# Altium PCB USV_pwrmtr_V2.PcbDoc (part 1 of 2)
Units mm, origin at the board's own origin, x right, y up, seen from the top; angles counter-clockwise.
Board outline 28.2 x 26.2 mm, 4 copper layers (Top Layer, Layer 1, Layer 2, Bottom Layer), stack 1.566 mm thick; 48 components, 47 nets, 320 pads, 208 vias.
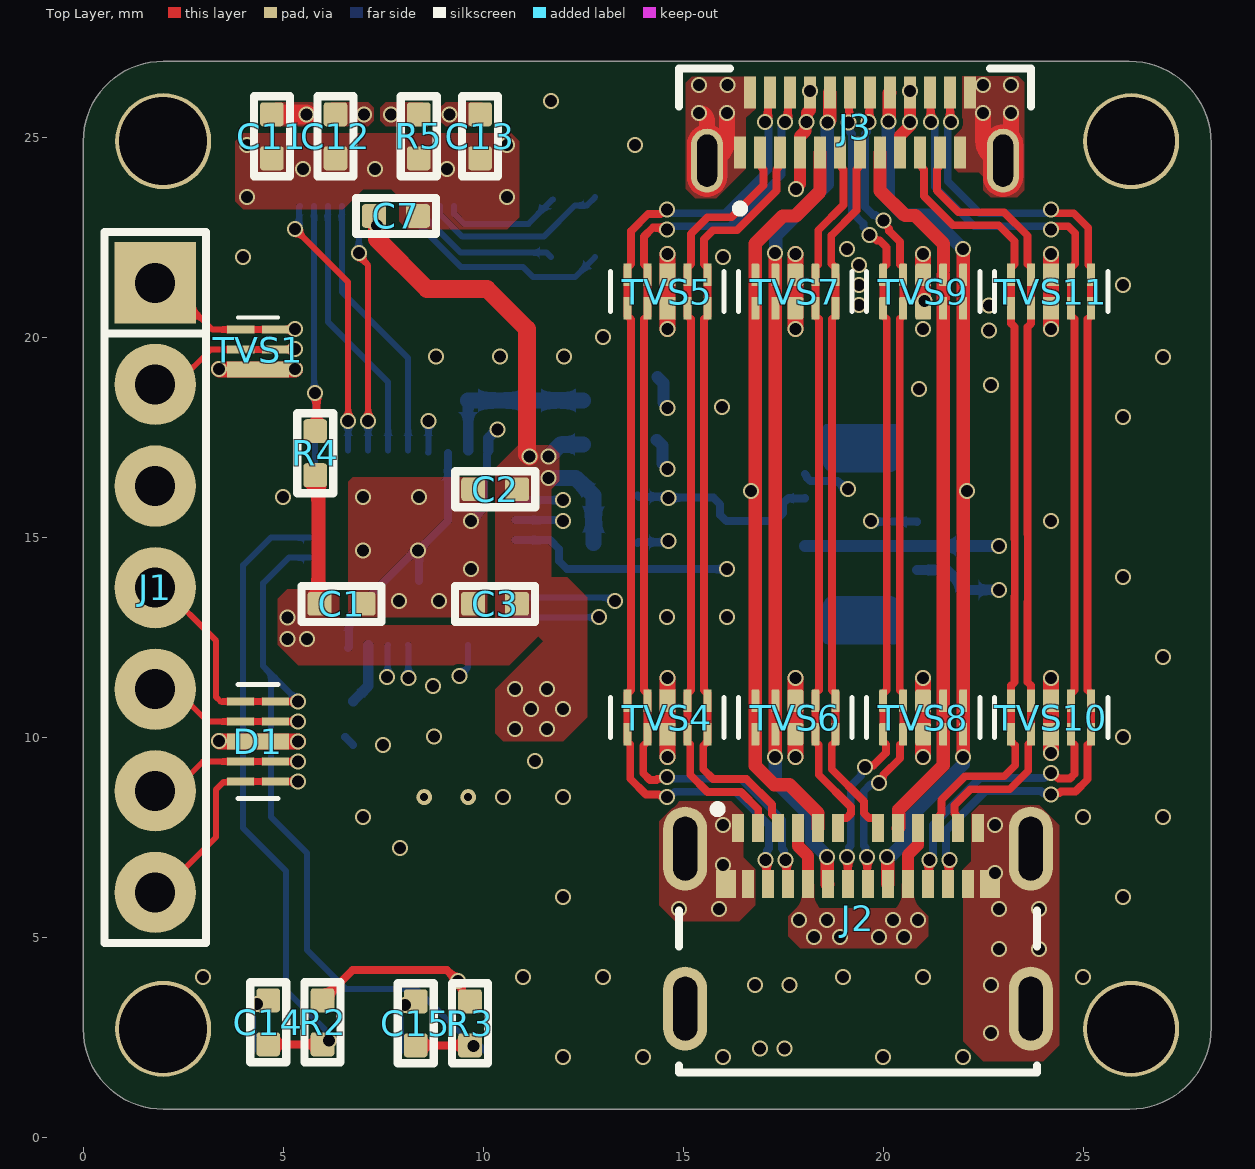
[diagram p0: Top Layer view]
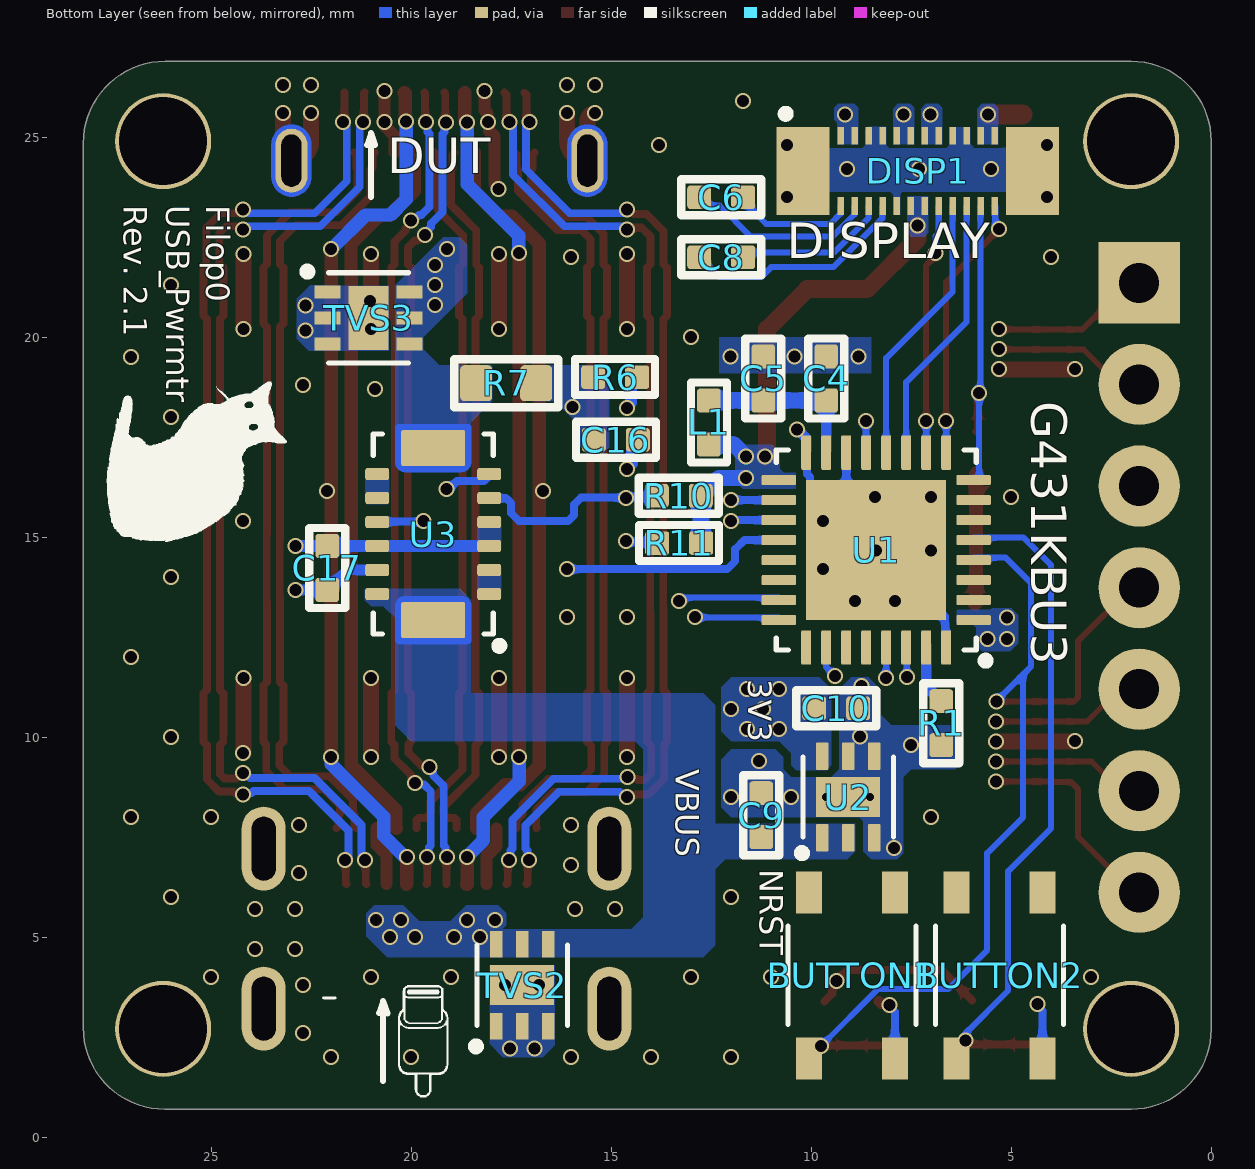
[diagram p1: Bottom Layer view, seen from below]
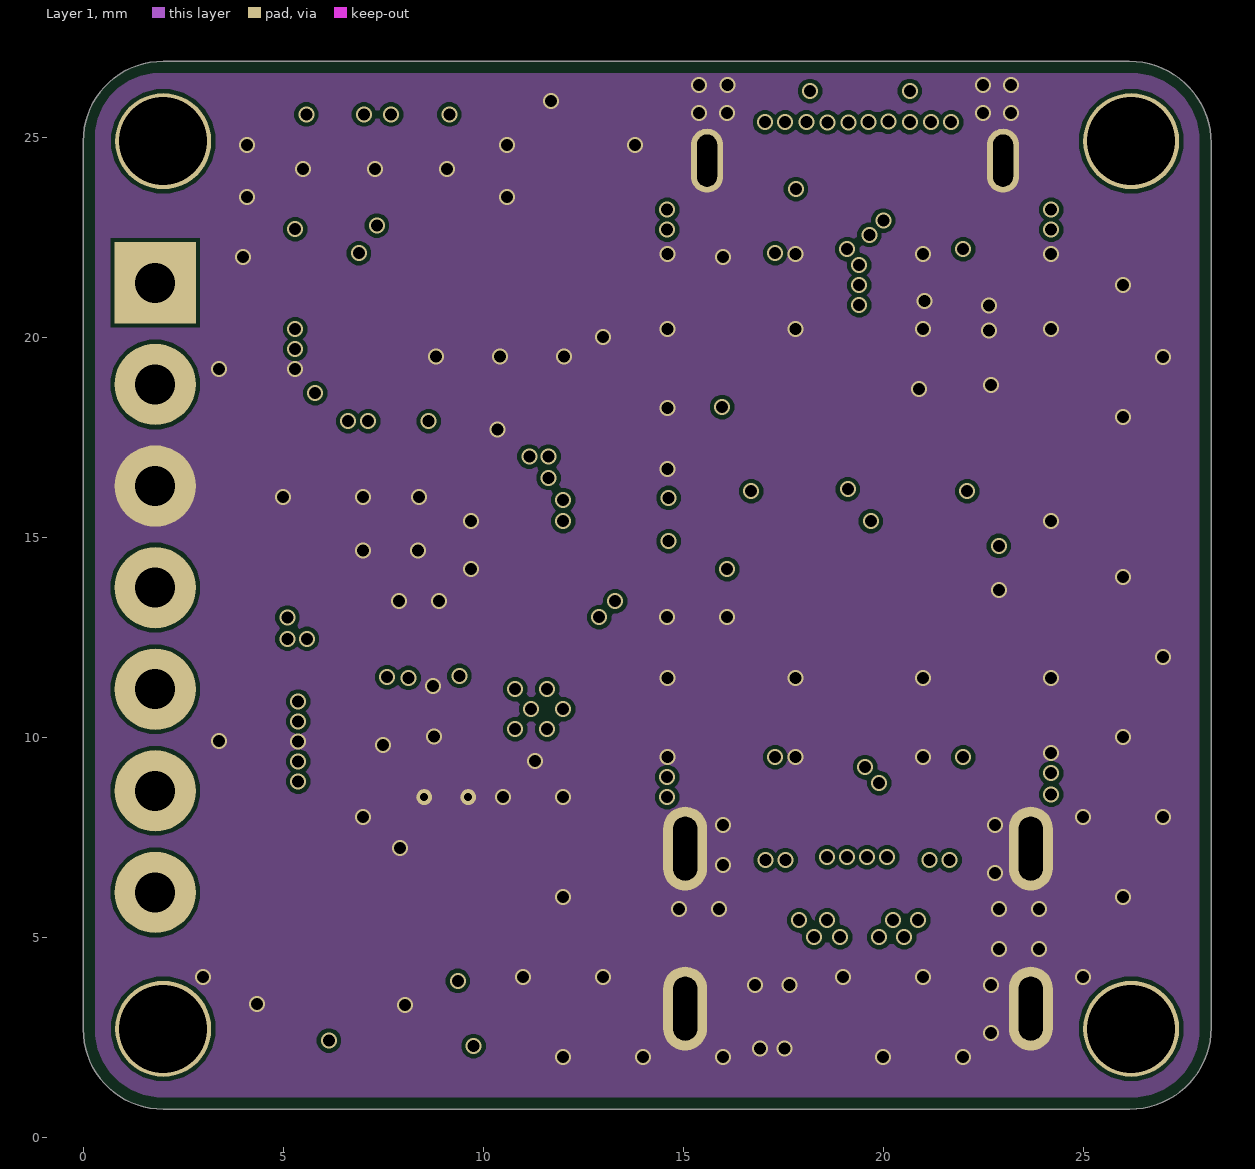
[diagram p2: Layer 1]
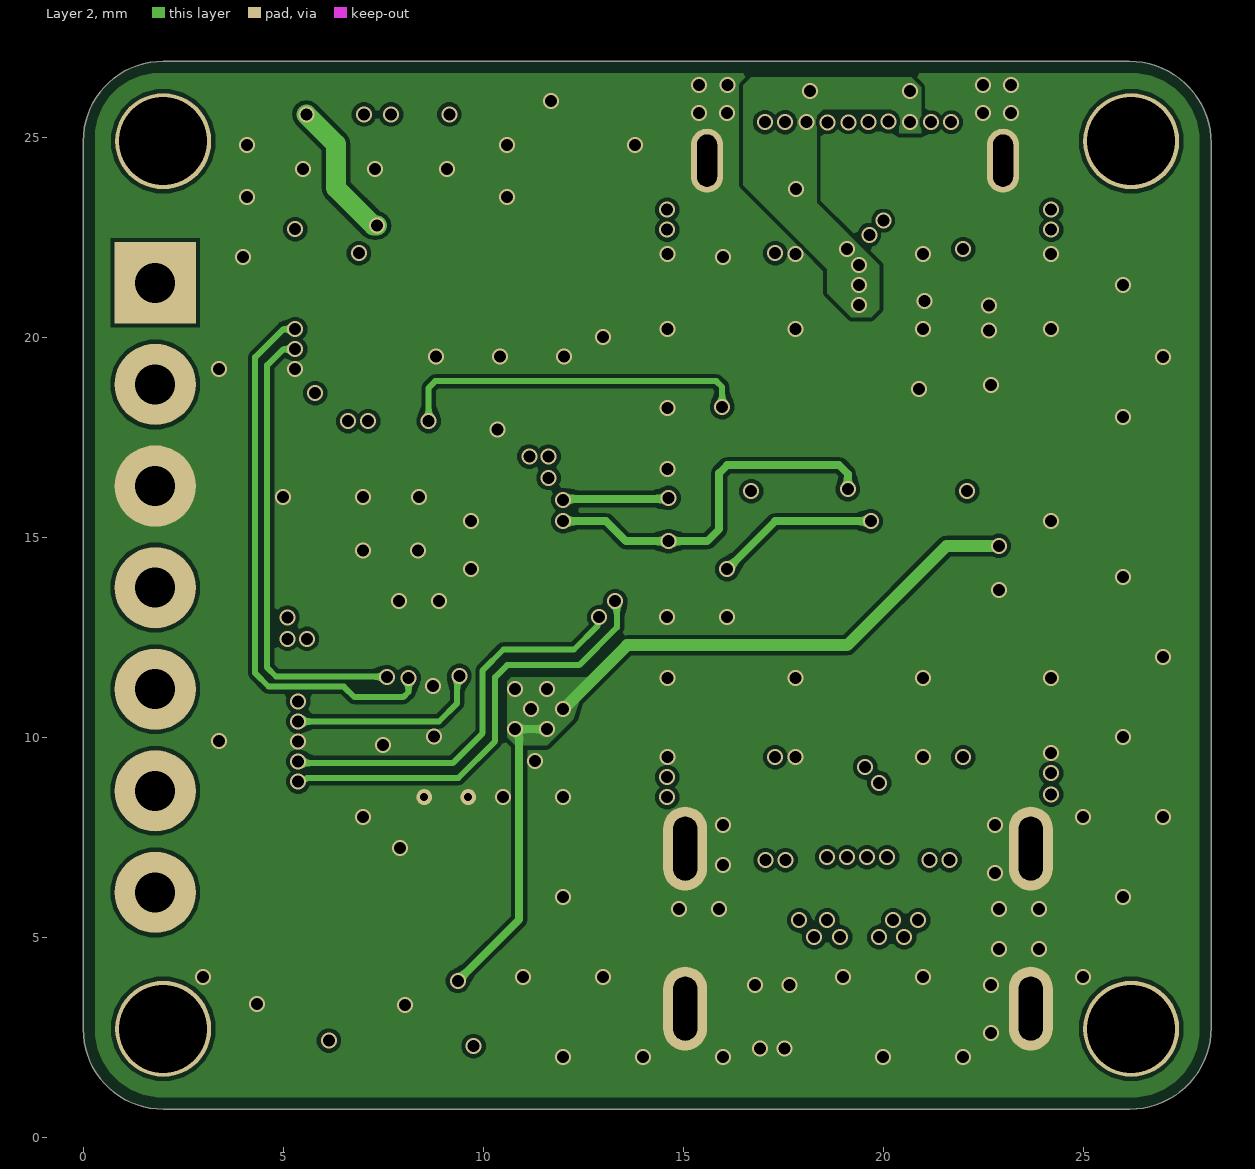
[diagram p3: Layer 2]

## Layer stack, top to bottom
Top Solder: solder mask 0.0254, SM-001, Dk 4
Top Layer: signal copper 0.035
Dielectric 1: prepreg 0.203, 7628*1, Dk 4.4
Layer 1: signal copper 0.03
Dielectric 3: core 1.03, Core, Dk 4.6
Layer 2: signal copper 0.03
Dielectric 5: prepreg 0.203, 7628*1, Dk 4.4
Bottom Layer: signal copper 0.035
Bottom Solder: solder mask 0.0254, SM-001, Dk 4

## Board outline
0,2.7 0,24.9 cw(c2,24.9) 2,26.9 26.151,26.9 cw(c26.151,24.851) 28.2,24.851 28.2,2.737 cw(c26.163,2.737) 26.163,0.7 2,0.7 cw(c2,2.7)

## Design rules (kind name [scope] priority, off if disabled: settings)
Clearance [All] p1: gap=0.128 ignorepadtopadclearanceinfootprint=TRUE except(0.1: Arc-Arc Arc-Track Arc-SMDPad Arc-Poly Track-Track Track-SMDPad Track-Via Track-Poly SMDPad-SMDPad SMDPad-Via SMDPad-Poly THPad-Poly Via-Via Via-Poly Fill-Poly Poly-Poly; 0.15: Arc-Hole Track-Hole SMDPad-Hole THPad-Hole Via-Hole Fill-Hole Poly-Hole Region-Hole Text-Hole; 0.2: Arc-THPad Track-THPad SMDPad-THPad THPad-THPad; 0.254: Arc-Text Track-Text SMDPad-Text THPad-Text Via-Text Fill-Text Poly-Text Region-Text)
DiffPairsRouting [All] p1: maxlimit=0.254 minlimit=0.127 mostfreqgap=0.254 toplayer_maxgap=0.127 toplayer_prefgap=0.127 toplayer_minwidth=0.198 toplayer_maxwidth=0.198 toplayer_prefwidth=0.198 bottomlayer_maxgap=0.127 bottomlayer_prefgap=0.127 bottomlayer_minwidth=0.198 bottomlayer_maxwidth=0.198 bottomlayer_prefwidth=0.198 impedanceprofiledriven=TRUE impedanceprofileid={0CCBBEDB-88AE-4A81-B5B6-981C13148A1B} impedanceprofilevalue=90.000000 maxuncoupledlength=12.7
HoleToHoleClearance [All] p1: gap=0.1 allowstackedmicrovias=TRUE
MinimumSolderMaskSliver [All] p1: minsoldermaskwidth=0
PolygonConnect [All] p1: connectstyle=Direct reliefconductorwidth=0.254 reliefentries=4 polygonreliefangle="90 Angle" airgapwidth=0.254
RoutingVias [All] p1: holewidth=0.4 width=0.3 viastyle="Through Hole" minholewidth=0.3 minwidth=0.2 maxholewidth=1.54 maxwidth=1.27
SilkToSilkClearance [All] p1: silktosilkclearance=0
SilkToSolderMaskClearance [IsPad] p1: minsilkscreentomaskgap=0 clearancetoexposedcopper=TRUE
SolderMaskExpansion [All] p1: expansion=0 istentingtop=FALSE
SupplyNets "Schematic Supply Nets_4" [InNet('CABLE_VCC_USB_C')] p1: voltage=0.000
SupplyNets "Schematic Supply Nets_3" [InNet('VDD')] p2: voltage=0.000
SupplyNets "Schematic Supply Nets_2" [InNet('DUT_VCC_USB_C')] p3: voltage=0.000
SupplyNets "Schematic Supply Nets" [InNet('GND')] p4: voltage=0.000
UnRoutedNet [All] p1: checkbadconnections=TRUE
Width SP50 [InNetClass('SP50')] p1: maxlimit=0.335 minlimit=0.254 preferedwidth=0.335 toplayer_minwidth=0.335 bottomlayer_minwidth=0.335 impedanceprofiledriven=TRUE impedanceprofileid={A461661E-8C72-4871-A755-800052891FCA} impedanceprofilevalue=50.000000 minimp=50.000000 maximp=50.000000 favimp=50.000000
Width [All] p2: maxlimit=20 minlimit=0.1 preferedwidth=0.15 minimp=50.000000 maximp=50.000000 favimp=50.000000
24 further rules are at their usual default settings.

## Classes and differential pairs
differential pair D1: +D1_P -D1_N
differential pair D2: +D2_P -D2_N
differential pair SSTX2: +SSTX2_P -SSTX2_N
differential pair SSTX1: +SSTX1_P -SSTX1_N
differential pair SSRX2: +SSRX2_P -SSRX2_N
differential pair SSRX1: +SSRX1_P -SSRX1_N

## Components (designator, comment, footprint, x,y, rotation, side; value= is the part's Value field where it differs from the comment)
BUTTON1 "SKRPABE010" SKRPABE010 8.984,4.049 r90 bottom
BUTTON2 "SKRPABE010" SKRPABE010 5.294,4.049 r90 bottom
C1 "100nF" C0402 6.457,13.335 r180 top
C2 "100nF" C0402 10.3,16.2 r0 top
C3 "4.7uF" C0402 10.296,13.335 r0 top
C4 "100nF" C0402 9.625,18.969 r270 bottom
C5 "1uF" C0402 11.2,18.969 r270 bottom
C6 "1uF" C0402 12.25,23.5 r180 bottom
C7 "1uF" C0402 7.819,23.032 r180 top
C8 "1uF" C0402 12.25,22 r180 bottom
C9 "10u" C0402 11.25,8.05 r270 bottom
C10 "1u" C0402 9.375,10.725 r0 bottom
C11 "1u" C0402 4.716,25.024 r90 top
C12 "2u2" C0402 6.307,25.024 r90 top
C13 "2u2" C0402 9.923,25.024 r90 top
C14 "100nF" C0402 4.625,2.874 r270 top
C15 "100nF" C0402 8.311,2.849 r270 top
C16 "100nF" C0402 14.885,17.437 r180 bottom
C17 "100nF" C0402 22.1,14.234 r270 bottom
D1 "RCLAMP0524PATCT" DIO_RCLAMP0524PATCT 4.37,9.893 r0 top
DISP1 "WP26DK-S024VA3" WP26DK-S024VA3 7.338,24.162 r0 bottom
J1 "CON7" SIP7 1.8,13.74 r270 top
J2 "USB4081-03-A" USB4081-03-A 19.367,4.805 r0 top
J3 "USB4155-03-C" USB4155-03-C 19.295,25.365 r180 top
L1 "ILHB0402ER102VHF12" L0402 12.557,17.869 r90 bottom
R1 "10k" R0402 6.75,10.35 r90 bottom
R2 "10k" R0402 5.982,2.874 r270 top
R3 "10k" R0402 9.669,2.849 r270 top
R4 "10k" R0402 5.8,17.1 r90 top
R5 "620k" R0402 8.388,25.024 r270 top
R6 "1k" R0402 14.901,19.002 r0 bottom
R7 "10k" R0603 17.625,18.85 r0 bottom
R10 "4k7" R0402 13.312,16.038 r0 bottom
R11 "4k7" R0402 13.302,14.854 r0 bottom
TVS1 "RCLAMP0522P.TCT" RCLAMP0522PTCT 4.37,19.693 r270 top
TVS2 "TVS2200DRVR" TVS2200DRVR 17.225,3.8 r90 bottom
TVS3 "TVS2200DRVR" TVS2200DRVR 21.068,20.482 r180 bottom
TVS4 "TPD4E02B04" TPD4E02B04 14.604,10.491 r270 top
TVS5 "TPD4E02B04" TPD4E02B04 14.604,21.14 r270 top
TVS6 "TPD4E05U06DQAR" TPD4E05U06DQAR 17.802,10.491 r270 top
TVS7 "TPD4E05U06DQAR" TPD4E05U06DQAR 17.802,21.14 r270 top
TVS8 "TPD4E05U06DQAR" TPD4E05U06DQAR 21,10.491 r270 top
TVS9 "TPD4E05U06DQAR" TPD4E05U06DQAR 21,21.14 r270 top
TVS10 "TPD4E02B04" TPD4E02B04 24.198,10.491 r270 top
TVS11 "TPD4E02B04" TPD4E02B04 24.198,21.14 r270 top
U1 "STM32G431KBU3" STM32G431KBU3 8.375,14.679 r0 bottom
U2 "TPS7B8233QDRVRQ1" TPS7B8233QDRVRQ1 9.075,8.505 r90 bottom
U3 "INA745AQWRELRQ1" INA745AQWRELRQ1 19.45,15.08 r0 bottom

## Footprints (in the part's own frame and the unit in brackets; to place one, negate y for a bottom-side part, rotate by r counter-clockwise, add the part's x,y. Pads: shape width x height; smd on the part's side, far side on the other; paste and mask are expansions set on the pad)
C0402 [mm]
  rrect25% 0.6x0.59 smd: 1(-0.55,0) 2(0.55,0)
  silkscreen extent -1,-0.45 1,0.45, body extent -0.48,-0.3 0.52,0.3, height 0.2
DIO_RCLAMP0524PATCT [mm]
  rect 0.675x0.2 smd: 1(-0.437,1) 2(-0.437,0.5) 4(-0.437,-0.5) 5(-0.437,-1) 6(0.437,-1) 7(0.437,-0.5) 9(0.437,0.5) 10(0.437,1)
  rect 1.55x0.4 smd: 3_8(0,0)
  silkscreen extent -0.5,-1.42 0.5,1.42, body extent -0.5,-1.25 0.5,1.25, height 0.65
INA745AQWRELRQ1 [mm]
  rrect35% 0.6x0.3 smd paste+0 mask+0: 1(-1.4,1.5) 2(-1.4,0.9) 3(-1.4,0.3) 4(-1.4,-0.3) 5(-1.4,-0.9) 6(-1.4,-1.5) 8(1.4,-1.5) 9(1.4,-0.9) 10(1.4,-0.3) 11(1.4,0.3) 12(1.4,0.9) 13(1.4,1.5)
  rrect10% 1.6x0.9 smd paste-2 mask+0: 7(0,-2.15) 14(0,2.15)
  Top Layer region: 0.86,2.749 0.866,2.749 0.871,2.748 0.876,2.747 0.881,2.745 0.886,2.743 0.891,2.741 0.895,2.739 0.9,2.737 0.904,2.734 0.909,2.731 0.913,2.728 0.917,2.724 0.921,2.721 0.924,2.717 0.928,2.713 0.931,2.709 0.934,2.704 0.937,2.7 0.939,2.695 0.941,2.691 0.943,2.686 0.945,2.681 0.947,2.676 0.948,2.671 0.949,2.666 0.949,2.66 0.95,2.655 0.95,2.65 0.95,1.8 0.95,1.787 0.949,1.774 0.947,1.761 0.945,1.748 0.941,1.735 0.938,1.723 0.933,1.71 0.928,1.698 0.923,1.687 0.917,1.675 0.91,1.664 0.902,1.653 0.894,1.643 0.886,1.633 0.877,1.623 0.867,1.614 0.857,1.606 0.847,1.598 0.836,1.59 0.825,1.583 0.813,1.577 0.802,1.572 0.79,1.567 0.777,1.562 0.765,1.559 0.752,1.555 0.739,1.553 0.726,1.551 0.713,1.55 -0.713,1.55 -0.726,1.551 -0.739,1.553 -0.752,1.555 -0.765,1.559 -0.777,1.562 -0.79,1.567 -0.802,1.572 -0.813,1.577 -0.825,1.583 -0.836,1.59 -0.847,1.598 -0.857,1.606 -0.867,1.614 -0.877,1.623 -0.886,1.633 -0.894,1.643 -0.902,1.653 -0.91,1.664 -0.917,1.675 -0.923,1.687 -0.928,1.698 -0.933,1.71 -0.938,1.723 -0.941,1.735 -0.945,1.748 -0.947,1.761 -0.949,1.774 -0.95,1.787 -0.95,1.8 -0.95,2.65 -0.95,2.655 -0.949,2.66 -0.949,2.666 -0.948,2.671 -0.947,2.676 -0.945,2.681 -0.943,2.686 -0.941,2.691 -0.939,2.695 -0.937,2.7 -0.934,2.704 -0.931,2.709 -0.928,2.713 -0.924,2.717 -0.921,2.721 -0.917,2.724 -0.913,2.728 -0.909,2.731 -0.904,2.734 -0.9,2.737 -0.895,2.739 -0.891,2.741 -0.886,2.743 -0.881,2.745 -0.876,2.747 -0.871,2.748 -0.866,2.749 -0.86,2.749 -0.855,2.75 0.855,2.75
  Top Layer region: 0.726,-1.551 0.739,-1.553 0.752,-1.555 0.765,-1.559 0.777,-1.562 0.79,-1.567 0.802,-1.572 0.813,-1.577 0.825,-1.583 0.836,-1.59 0.847,-1.598 0.857,-1.606 0.867,-1.614 0.877,-1.623 0.886,-1.633 0.894,-1.643 0.902,-1.653 0.91,-1.664 0.917,-1.675 0.923,-1.687 0.928,-1.698 0.933,-1.71 0.938,-1.723 0.941,-1.735 0.945,-1.748 0.947,-1.761 0.949,-1.774 0.95,-1.787 0.95,-1.8 0.95,-2.65 0.95,-2.655 0.949,-2.66 0.949,-2.666 0.948,-2.671 0.947,-2.676 0.945,-2.681 0.943,-2.686 0.941,-2.691 0.939,-2.695 0.937,-2.7 0.934,-2.704 0.931,-2.709 0.928,-2.713 0.924,-2.717 0.921,-2.721 0.917,-2.724 0.913,-2.728 0.909,-2.731 0.904,-2.734 0.9,-2.737 0.895,-2.739 0.891,-2.741 0.886,-2.743 0.881,-2.745 0.876,-2.747 0.871,-2.748 0.866,-2.749 0.86,-2.749 0.855,-2.75 -0.855,-2.75 -0.86,-2.749 -0.866,-2.749 -0.871,-2.748 -0.876,-2.747 -0.881,-2.745 -0.886,-2.743 -0.891,-2.741 -0.895,-2.739 -0.9,-2.737 -0.904,-2.734 -0.909,-2.731 -0.913,-2.728 -0.917,-2.724 -0.921,-2.721 -0.924,-2.717 -0.928,-2.713 -0.931,-2.709 -0.934,-2.704 -0.937,-2.7 -0.939,-2.695 -0.941,-2.691 -0.943,-2.686 -0.945,-2.681 -0.947,-2.676 -0.948,-2.671 -0.949,-2.666 -0.949,-2.66 -0.95,-2.655 -0.95,-2.65 -0.95,-1.8 -0.95,-1.787 -0.949,-1.774 -0.947,-1.761 -0.945,-1.748 -0.941,-1.735 -0.938,-1.723 -0.933,-1.71 -0.928,-1.698 -0.923,-1.687 -0.917,-1.675 -0.91,-1.664 -0.902,-1.653 -0.894,-1.643 -0.886,-1.633 -0.877,-1.623 -0.867,-1.614 -0.857,-1.606 -0.847,-1.598 -0.836,-1.59 -0.825,-1.583 -0.813,-1.577 -0.802,-1.572 -0.79,-1.567 -0.777,-1.562 -0.765,-1.559 -0.752,-1.555 -0.739,-1.553 -0.726,-1.551 -0.713,-1.55 0.713,-1.55
  silkscreen extent -1.75,-2.5 1.5,2.89, body extent -1.5,-2.5 1.5,2.5, height 1
L0402 [mm]
  rrect25% 0.6x0.59 smd: 1(-0.55,0) 2(0.55,0)
  silkscreen extent -1,-0.45 1,0.45, body extent -0.5,-0.25 0.5,0.25, height 0.51
R0402 [mm]
  rrect25% 0.6x0.59 smd: 1(-0.55,0) 2(0.55,0)
  silkscreen extent -1,-0.45 1,0.45, body extent -0.52,-0.3 0.52,0.3, height 0.34
R0603 [mm]
  rrect25% 0.8x0.9 smd: 1(-0.75,0) 2(0.75,0)
  silkscreen extent -1.3,-0.6 1.3,0.6, body extent -0.8,-0.4 0.8,0.4, height 0.3
RCLAMP0522PTCT [mm]
  rect 0.2x0.68 smd: 1(-0.5,-0.435) 2(0,-0.435) 5(0,0.435) 6(-0.5,0.435)
  rect 0.4x0.775 smd: 3(0.5,-0.388) 4(0.5,0.387)
  silkscreen extent -0.8,-0.5 -0.8,0.5, body extent -0.8,-0.5 0.8,0.5, height 0.58
SIP7 [mil]
  rect 80x80 hole 39.37: 1(-300,0)
  round 80 hole 39.37: 2(-200,0) 3(-100,0) 4(0,0) 5(100,0) 6(200,0) 7(300,0)
  silkscreen extent -350,-50 350,50
SKRPABE010 [mm]
  rect 1.05x0.65 smd: 1(-2.075,1.075) 2(2.075,1.075) 3(-2.075,-1.075) 4(2.075,-1.075)
  silkscreen extent -1.23,-1.6 1.23,1.6, body extent -2.3,-1.6 2.3,1.6, height 2.5
STM32G431KBU3 [mm] "ARM® Cortex®-M4F STM32G4 Microcontroller IC 32-Bit Single-Core 170MHz 128KB (128K x 8) FLASH 32-UFQFPN (5x5)"
  rrect25% 0.86x0.25 smd: 1(-2.435,1.75) 2(-2.435,1.25) 3(-2.435,0.75) 4(-2.435,0.25) 5(-2.435,-0.25) 6(-2.435,-0.75) 7(-2.435,-1.25) 8(-2.435,-1.75) 17(2.435,-1.75) 18(2.435,-1.25) 19(2.435,-0.75) 20(2.435,-0.25) 21(2.435,0.25) 22(2.435,0.75) 23(2.435,1.25) 24(2.435,1.75)
  rrect25% 0.25x0.86 smd: 9(-1.75,-2.435) 10(-1.25,-2.435) 11(-0.75,-2.435) 12(-0.25,-2.435) 13(0.25,-2.435) 14(0.75,-2.435) 15(1.25,-2.435) 16(1.75,-2.435) 25(1.75,2.435) 26(1.25,2.435) 27(0.75,2.435) 28(0.25,2.435) 29(-0.25,2.435) 30(-0.75,2.435) 31(-1.25,2.435) 32(-1.75,2.435)
  rect 3.5x3.5 smd paste-0.64: 33(0,0)
  silkscreen extent -2.83,-2.5 2.5,2.87, body extent -2.5,-2.5 2.5,2.5, height 0.6
TPD4E02B04 [mm]
  rect 0.565x0.2 smd mask+0: 1(-0.417,1) 2(-0.417,0.5) 4(-0.417,-0.5) 5(-0.417,-1) 6(0.417,-1) 7(0.417,-0.5) 9(0.417,0.5) 10(0.417,1)
  rect 0.565x0.4 smd paste-1 mask+0: 3(-0.417,0) 8(0.417,0)
  silkscreen extent -0.5,-1.42 0.5,1.42, body extent -0.5,-1.25 0.5,1.25, height 0.55
TPD4E05U06DQAR [mm] "Quad 0.5-pF, 5.5-V, ±12-kV ESD protection diode for USB, HDMI & High Speed Interfaces"
  rrect25% 0.565x0.2 smd mask+0: 1(-0.417,1) 2(-0.417,0.5) 4(-0.417,-0.5) 5(-0.417,-1) 6(0.417,-1) 7(0.417,-0.5) 9(0.417,0.5) 10(0.417,1)
  rrect25% 0.565x0.4 smd paste-1 mask+0: 3(-0.417,0) 8(0.417,0)
  silkscreen extent -0.5,-1.42 0.5,1.42, body extent -0.5,-1.25 0.5,1.25, height 0.55
TPS7B8233QDRVRQ1 [mm] "Automotive 300-mA, off-battery (40-V), ultra-low-IQ LDO with enable in AEC-Q100 Grade-0 and Grade-1"
  rrect25% 0.69x0.32 smd: 1(-1.02,0.65) 2(-1.02,0) 3(-1.02,-0.65) 4(1.02,-0.65) 5(1.02,0) 6(1.02,0.65)
  rect 1x1.6 smd paste-2: 7(0,0)
  round 0.4 hole 0.2 mask+0: 8(0,0.55) 9(0,-0.55)
  silkscreen extent -1.5,-1.13 1,1.26, body extent -1,-1 1,1, height 0.8
TVS2200DRVR [mm]
  rect 0.66x0.32 smd: 1(-1.025,0.65) 2(-1.025,0) 3(-1.025,-0.65) 4(1.025,-0.65) 5(1.025,0) 6(1.025,0.65)
  rect 1x1.6 smd paste-2: 7(0,0)
  silkscreen extent -1.63,-1.13 1,1.26, body extent -1,-1 1,1, height 0.8
USB4081-03-A [mm] "Type C USB 3.2 Gen 2 Connector"
  rect 0.3x0.7 smd: A1(-2.999,2.921) A2(-2.499,2.921) A3(-1.999,2.921) A4(-1.499,2.921) A5(-0.999,2.921) A6(-0.499,2.921) A7(0.501,2.921) A8(1.001,2.921) A9(1.501,2.921) A10(2.001,2.921) A11(2.501,2.921) A12(3.001,2.921) B1(2.751,1.521) B2(2.251,1.521) B3(1.751,1.521) B4(1.251,1.521) B5(0.751,1.521) B6(0.251,1.521) B7(-0.249,1.521) B8(-0.749,1.521) B9(-1.249,1.521) B10(-1.749,1.521) B11(-2.249,1.521) B12(-2.749,1.521)
  oval 1.1x2.1 hole 0.6 slot 1.6 at 90 deg: S1(-4.319,-1.589) S2(4.321,-1.589) S3(-4.319,2.411) S4(4.321,2.411)
  rect 0.5x0.7 smd: S5(-3.299,1.521) S6(3.301,1.521)
  silkscreen extent -4.47,-3.19 4.47,3.5, body extent -4.47,-4.81 4.47,3, height 3.26
USB4155-03-C [mm] "USB-C (USB TYPE-C) USB 3.2 Gen 2 (USB 3.1 Gen 2, Superspeed + (USB 3.1)) Plug Connector 24 Position Board Edge, Cutout; Surface Mount; Through Hole, Right Angle"
  rect 0.3x0.8 smd: A1(2.875,0.75) A2(2.375,0.75) A3(1.875,0.75) A4(1.375,0.75) A5(0.875,0.75) A6(0.375,0.75) A7(-0.125,0.75) A8(-0.625,0.75) A9(-1.125,0.75) A10(-1.625,0.75) A11(-2.125,0.75) A12(-2.625,0.75) B1(-2.875,-0.75) B2(-2.375,-0.75) B3(-1.875,-0.75) B4(-1.375,-0.75) B5(-0.875,-0.75) B6(-0.375,-0.75) B7(0.125,-0.75) B8(0.625,-0.75) B9(1.125,-0.75) B10(1.625,-0.75) B11(2.125,-0.75) B12(2.625,-0.75)
  oval 0.8x1.6 hole 0.5 slot 1.3 at 90 deg mask+0: S1(-3.7,0.95) S2(3.7,0.95)
  Top Layer region: -3.674,1.849 -3.648,1.847 -3.622,1.844 -3.596,1.839 -3.571,1.833 -3.545,1.826 -3.521,1.817 -3.497,1.807 -3.473,1.796 -3.45,1.783 -3.428,1.769 -3.406,1.755 -3.385,1.739 -3.365,1.722 -3.346,1.704 -3.328,1.685 -3.311,1.665 -3.295,1.644 -3.281,1.622 -3.267,1.6 -3.254,1.577 -3.243,1.553 -3.233,1.529 -3.224,1.505 -3.217,1.479 -3.211,1.454 -3.206,1.428 -3.203,1.402 -3.201,1.376 -3.2,1.35 -3.2,0.55 -3.201,0.524 -3.203,0.498 -3.206,0.472 -3.211,0.446 -3.217,0.421 -3.224,0.395 -3.233,0.371 -3.243,0.347 -3.254,0.323 -3.267,0.3 -3.281,0.278 -3.295,0.256 -3.311,0.235 -3.328,0.215 -3.346,0.196 -3.365,0.178 -3.385,0.161 -3.406,0.145 -3.428,0.131 -3.45,0.117 -3.473,0.104 -3.497,0.093 -3.521,0.083 -3.545,0.074 -3.571,0.067 -3.596,0.061 -3.622,0.056 -3.648,0.053 -3.674,0.051 -3.7,0.05 -3.726,0.051 -3.752,0.053 -3.778,0.056 -3.804,0.061 -3.829,0.067 -3.855,0.074 -3.879,0.083 -3.903,0.093 -3.927,0.104 -3.95,0.117 -3.972,0.131 -3.994,0.145 -4.015,0.161 -4.035,0.178 -4.054,0.196 -4.072,0.215 -4.089,0.235 -4.105,0.256 -4.119,0.278 -4.133,0.3 -4.146,0.323 -4.157,0.347 -4.167,0.371 -4.176,0.395 -4.183,0.421 -4.189,0.446 -4.194,0.472 -4.197,0.498 -4.199,0.524 -4.2,0.55 -4.2,1.35 -4.199,1.376 -4.197,1.402 -4.194,1.428 -4.189,1.454 -4.183,1.479 -4.176,1.505 -4.167,1.529 -4.157,1.553 -4.146,1.577 -4.133,1.6 -4.119,1.622 -4.105,1.644 -4.089,1.665 -4.072,1.685 -4.054,1.704 -4.035,1.722 -4.015,1.739 -3.994,1.755 -3.972,1.769 -3.95,1.783 -3.927,1.796 -3.903,1.807 -3.879,1.817 -3.855,1.826 -3.829,1.833 -3.804,1.839 -3.778,1.844 -3.752,1.847 -3.726,1.849 -3.7,1.85
  Top Layer region: 3.726,1.849 3.752,1.847 3.778,1.844 3.804,1.839 3.829,1.833 3.855,1.826 3.879,1.817 3.903,1.807 3.927,1.796 3.95,1.783 3.972,1.769 3.994,1.755 4.015,1.739 4.035,1.722 4.054,1.704 4.072,1.685 4.089,1.665 4.105,1.644 4.119,1.622 4.133,1.6 4.146,1.577 4.157,1.553 4.167,1.529 4.176,1.505 4.183,1.479 4.189,1.454 4.194,1.428 4.197,1.402 4.199,1.376 4.2,1.35 4.2,0.55 4.199,0.524 4.197,0.498 4.194,0.472 4.189,0.446 4.183,0.421 4.176,0.395 4.167,0.371 4.157,0.347 4.146,0.323 4.133,0.3 4.119,0.278 4.105,0.256 4.089,0.235 4.072,0.215 4.054,0.196 4.035,0.178 4.015,0.161 3.994,0.145 3.972,0.131 3.95,0.117 3.927,0.104 3.903,0.093 3.879,0.083 3.855,0.074 3.829,0.067 3.804,0.061 3.778,0.056 3.752,0.053 3.726,0.051 3.7,0.05 3.674,0.051 3.648,0.053 3.622,0.056 3.596,0.061 3.571,0.067 3.545,0.074 3.521,0.083 3.497,0.093 3.473,0.104 3.45,0.117 3.428,0.131 3.406,0.145 3.385,0.161 3.365,0.178 3.346,0.196 3.328,0.215 3.311,0.235 3.295,0.256 3.281,0.278 3.267,0.3 3.254,0.323 3.243,0.347 3.233,0.371 3.224,0.395 3.217,0.421 3.211,0.446 3.206,0.472 3.203,0.498 3.201,0.524 3.2,0.55 3.2,1.35 3.201,1.376 3.203,1.402 3.206,1.428 3.211,1.454 3.217,1.479 3.224,1.505 3.233,1.529 3.243,1.553 3.254,1.577 3.267,1.6 3.281,1.622 3.295,1.644 3.311,1.665 3.328,1.685 3.346,1.704 3.365,1.722 3.385,1.739 3.406,1.755 3.428,1.769 3.45,1.783 3.473,1.796 3.497,1.807 3.521,1.817 3.545,1.826 3.571,1.833 3.596,1.839 3.622,1.844 3.648,1.847 3.674,1.849 3.7,1.85
  Bottom Layer region: -3.674,1.849 -3.648,1.847 -3.622,1.844 -3.596,1.839 -3.571,1.833 -3.545,1.826 -3.521,1.817 -3.497,1.807 -3.473,1.796 -3.45,1.783 -3.428,1.769 -3.406,1.755 -3.385,1.739 -3.365,1.722 -3.346,1.704 -3.328,1.685 -3.311,1.665 -3.295,1.644 -3.281,1.622 -3.267,1.6 -3.254,1.577 -3.243,1.553 -3.233,1.529 -3.224,1.505 -3.217,1.479 -3.211,1.454 -3.206,1.428 -3.203,1.402 -3.201,1.376 -3.2,1.35 -3.2,0.55 -3.201,0.524 -3.203,0.498 -3.206,0.472 -3.211,0.446 -3.217,0.421 -3.224,0.395 -3.233,0.371 -3.243,0.347 -3.254,0.323 -3.267,0.3 -3.281,0.278 -3.295,0.256 -3.311,0.235 -3.328,0.215 -3.346,0.196 -3.365,0.178 -3.385,0.161 -3.406,0.145 -3.428,0.131 -3.45,0.117 -3.473,0.104 -3.497,0.093 -3.521,0.083 -3.545,0.074 -3.571,0.067 -3.596,0.061 -3.622,0.056 -3.648,0.053 -3.674,0.051 -3.7,0.05 -3.726,0.051 -3.752,0.053 -3.778,0.056 -3.804,0.061 -3.829,0.067 -3.855,0.074 -3.879,0.083 -3.903,0.093 -3.927,0.104 -3.95,0.117 -3.972,0.131 -3.994,0.145 -4.015,0.161 -4.035,0.178 -4.054,0.196 -4.072,0.215 -4.089,0.235 -4.105,0.256 -4.119,0.278 -4.133,0.3 -4.146,0.323 -4.157,0.347 -4.167,0.371 -4.176,0.395 -4.183,0.421 -4.189,0.446 -4.194,0.472 -4.197,0.498 -4.199,0.524 -4.2,0.55 -4.2,1.35 -4.199,1.376 -4.197,1.402 -4.194,1.428 -4.189,1.454 -4.183,1.479 -4.176,1.505 -4.167,1.529 -4.157,1.553 -4.146,1.577 -4.133,1.6 -4.119,1.622 -4.105,1.644 -4.089,1.665 -4.072,1.685 -4.054,1.704 -4.035,1.722 -4.015,1.739 -3.994,1.755 -3.972,1.769 -3.95,1.783 -3.927,1.796 -3.903,1.807 -3.879,1.817 -3.855,1.826 -3.829,1.833 -3.804,1.839 -3.778,1.844 -3.752,1.847 -3.726,1.849 -3.7,1.85
  Bottom Layer region: 3.726,1.849 3.752,1.847 3.778,1.844 3.804,1.839 3.829,1.833 3.855,1.826 3.879,1.817 3.903,1.807 3.927,1.796 3.95,1.783 3.972,1.769 3.994,1.755 4.015,1.739 4.035,1.722 4.054,1.704 4.072,1.685 4.089,1.665 4.105,1.644 4.119,1.622 4.133,1.6 4.146,1.577 4.157,1.553 4.167,1.529 4.176,1.505 4.183,1.479 4.189,1.454 4.194,1.428 4.197,1.402 4.199,1.376 4.2,1.35 4.2,0.55 4.199,0.524 4.197,0.498 4.194,0.472 4.189,0.446 4.183,0.421 4.176,0.395 4.167,0.371 4.157,0.347 4.146,0.323 4.133,0.3 4.119,0.278 4.105,0.256 4.089,0.235 4.072,0.215 4.054,0.196 4.035,0.178 4.015,0.161 3.994,0.145 3.972,0.131 3.95,0.117 3.927,0.104 3.903,0.093 3.879,0.083 3.855,0.074 3.829,0.067 3.804,0.061 3.778,0.056 3.752,0.053 3.726,0.051 3.7,0.05 3.674,0.051 3.648,0.053 3.622,0.056 3.596,0.061 3.571,0.067 3.545,0.074 3.521,0.083 3.497,0.093 3.473,0.104 3.45,0.117 3.428,0.131 3.406,0.145 3.385,0.161 3.365,0.178 3.346,0.196 3.328,0.215 3.311,0.235 3.295,0.256 3.281,0.278 3.267,0.3 3.254,0.323 3.243,0.347 3.233,0.371 3.224,0.395 3.217,0.421 3.211,0.446 3.206,0.472 3.203,0.498 3.201,0.524 3.2,0.55 3.2,1.35 3.201,1.376 3.203,1.402 3.206,1.428 3.211,1.454 3.217,1.479 3.224,1.505 3.233,1.529 3.243,1.553 3.254,1.577 3.267,1.6 3.281,1.622 3.295,1.644 3.311,1.665 3.328,1.685 3.346,1.704 3.365,1.722 3.385,1.739 3.406,1.755 3.428,1.769 3.45,1.783 3.473,1.796 3.497,1.807 3.521,1.817 3.545,1.826 3.571,1.833 3.596,1.839 3.622,1.844 3.648,1.847 3.674,1.849 3.7,1.85
  silkscreen extent -4.4,-1.35 4.4,2.25, body extent -4.4,-14.05 4.4,1.45, height 1.6
WP26DK-S024VA3 [mm]
  rect 0.17x0.44 smd paste+0 mask+0: 1(1.925,-0.88) 2(1.925,0.88) 3(1.575,-0.88) 4(1.575,0.88) 5(1.225,-0.88) 6(1.225,0.88) 7(0.875,-0.88) 8(0.875,0.88) 9(0.525,-0.88) 10(0.525,0.88) 11(0.175,-0.88) 12(0.175,0.88) 13(-0.175,-0.88) 14(-0.175,0.88) 15(-0.525,-0.88) 16(-0.525,0.88) 17(-0.875,-0.88) 18(-0.875,0.88) 19(-1.225,-0.88) 20(-1.225,0.88) 21(-1.575,-0.88) 22(-1.575,0.88) 23(-1.925,-0.88) 24(-1.925,0.88)
  rect 1.33x2.2 smd paste-2 mask+0: P1(2.87,0) P2(-2.87,0)
  silkscreen extent 3.2,-1.52 3.4,-1.33, body extent -3.37,-0.95 3.37,0.95, height 0.6

## Part data
BUTTON1 BUTTON2: "Switch Tactile N.O. SPST Button J-Bend 0.05A 16VDC 1.57N SMD Automotive T/R"
C1 C2 C3 C4 C5 C6 C7 C8 C9 C10 C11 C12 C13 C14 C15 C16 C17: library part C, "Kondensator ceramiczny SMD"
D1: "15V Clamp 5A (8/20Âµs) Ipp Tvs Diode Surface Mount SLP2510P8", Package="UFDFN-10 Semtech", Check_prices=https://www.snapeda.com/parts/RCLAMP0524PATCT/Semtech+Corporation/view-part/?ref=eda, MF="Semtech Corporation", MP=RCLAMP0524PATCT, SnapEDA_Link=https://www.snapeda.com/parts/RCLAMP0524PATCT/Semtech+Corporation/view-part/?ref=snap
J1: "Connector"
J2: "Type C USB 3.2 Gen 2 Connector"
J3: "USB-C (USB TYPE-C) USB 3.2 Gen 2 (USB 3.1 Gen 2, Superspeed + (USB 3.1)) Receptacle Connector 24 Position Surface Mount, Right Angle; Through Hole"
L1: library part L, "Cewka/Koralik ferrytowy"
R1 R2 R3 R4 R5 R6 R7 R10 R11: library part R, "Rezystor SMD"
TVS1: "TVS Diode (Bi-directional)", Manufacturer_Name=SEMTECH, Mouser Part Number=947-RCLAMP0522P.TCT, Arrow Part Number=RCLAMP0522P.TCT, Arrow Price/Stock=https://www.arrow.com/en/products/rclamp0522p.tct/semtech?utm_currency=USD&region=nac, Datasheet Link=https://www.digikey.ph/en/products/detail/semtech-corporation/RCLAMP0522P-TCT/5113632, Height=0.65mm, Manufacturer_Part_Number=RCLAMP0522P.TCT, Mouser Price/Stock=https://www.mouser.co.uk/ProductDetail/Semtech/RCLAMP0522P.TCT?qs=rBWM4%252BvDhIdKBWbIaH8MsA%3D%3D
TVS2 TVS3: "22V flat-clamp surge protection device", ComponentLink1Description="New link", ComponentLink1URL=https://www.mouser.pl/ProductDetail/Texas-Instruments/TVS2200DRVR?qs=W0yvOO0ixfHPbvei2cYdIw%3D%3D
TVS6 TVS7 TVS8 TVS9: "ESD Protection Diodes / TVS Diodes 0.66-pF +/-3.6-V +/- 30-kV ESD protectio", ComponentLink1Description="New link", ComponentLink1URL=https://www.mouser.pl/ProductDetail/Texas-Instruments/TPD4E05U06DQAR?qs=%2FCrDlo5IrVPi4woOvWz0qA%3D%3D
U1: "ARM® Cortex®-M4F STM32G4 Microcontroller IC 32-Bit Single-Core 170MHz 128KB (128K x 8) FLASH 32-UFQFPN (5x5)", ComponentLink1Description="New link", ComponentLink1URL=https://www.mouser.pl/ProductDetail/STMicroelectronics/STM32G431KBU3?qs=PzGy0jfpSMtowkKWTRQBRw%3D%3D
U2: "WSON-6, Automotive 300-mA, off-battery (40-V), ultra-low-IQ LDO with enable in AEC-Q100 Grade-0 and Grade-1"
U3: "AEC-Q100 40V 16-bit high-precision I²C output digital power monitor with 800-µΩ EZShunt™ Technology", ComponentLink1Description="New link", ComponentLink1URL=https://www.digikey.com/en/products/detail/texas-instruments/INA745AQWRELRQ1/28022225
TVS4 TVS5 TVS10 TVS11: ComponentLink1Description="New link", ComponentLink1URL=https://www.mouser.pl/ProductDetail/Texas-Instruments/TPD4E02B04DQAR?qs=8%2FmU9qzJpL%2FFVYtHO1iV9g%3D%3D

## Free pads (board coordinates)
  round 2.4 hole 2.2: 10(2,2.711) 10(2,24.9) 10(26.2,2.711) 10(26.2,24.9)

## Via types
v1: diameter 0.4, hole 0.3, Top Layer to Bottom Layer, tented both sides, 208 vias

## Nets (pads, with @x,y where several pads share a name; then routed paths per layer and width w, separated by ;. In a path a pad name is that pad's centre, name@x,y a point inside that pad or via, vN(x,y) a via of type N, cw(c..) or ccw(c..) an arc to the next point about the centre after c; other vN are vias at no path point)
ADC1_IN15: C16.1 R6.2 R7.1 U1.13 | length 9.6
  Layer 2 w0.15: v1(8.637,17.9) 8.637,18.737 8.8,18.9 15.828,18.9 15.973,18.756 v1(15.973,18.254)
  Bottom Layer w0.15: U1.13@8.625,17.114 8.631,17.12 8.631,17.891 v1@8.637,17.897
ALERT: U1.20 U3.10 | length 11
  Layer 2 w0.2: v1(16.1,14.2) 17.3,15.4 v1(19.689,15.4)
  Bottom Layer w0.2: U1.20@10.81,14.929 11.671,14.929 11.9,14.7 11.9,14.4 12.1,14.2 v1(16.1,14.2) ; v1(19.689,15.4) 19.698,15.39 20.84,15.39 U3.10@20.85,15.38
BOOT0: R1.2 U1.31 | length 1.6
  Bottom Layer w0.254: R1.2@6.75,10.9 6.75,10.905 7.125,11.28 U1.31@7.125,12.308
BUTTON0: BUTTON2.1 C14.2 R2.2 U1.5 | length 16.5
  Top Layer w0.2: C14.2@4.58,2.324 R2.2@6.047,2.324
  Bottom Layer w0.15: U1.5@5.94,14.989 4.689,14.989 4,14.3 4,7.725 5.075,6.65 5.075,3.668 6.14,2.602 v1(6.14,2.418)
CABLE_VCC_USB_C: C9.2 J2.A4 J2.A9 J2.B4 J2.B9 TVS2.4 TVS2.5 TVS2.6 U2.1 U2.2 U3.13 U3.14 | length 3
  Top Layer w0.3: J2.A4@17.868,7.721 17.868,7.282 18.118,7.032 J2.B9@18.118,6.326 ; J2.B4@20.618,6.326 20.618,7.059 20.868,7.309 J2.A9@20.868,7.726
  other v1: 18.275,5 18.925,5 19.9,5 20.525,5 17.9,5.425 18.6,5.425 20.25,5.425 20.875,5.425
CC1: J2.A5 J3.A5 TVS6.5 TVS6.6 TVS7.5 TVS7.6 | length 18.6
  Top Layer w0.335: J2.A5@18.368,7.726 18.368,8.104 17.655,8.817 17.271,8.817 16.802,9.286 TVS6.6@16.802,10.074 TVS6.5@16.802,10.909 TVS7.6@16.802,20.723 TVS7.5@16.802,21.558 16.802,22.343 17.49,23.031 17.808,23.031 18.42,23.643 J3.A5@18.42,24.615
  other v1: 16.7,16.15
CC2: J2.B5 J3.B5 TVS8.1 TVS8.10 TVS9.1 TVS9.10 | length 21.8
  Top Layer w0.335: v1(20.1,7) 20.109,6.991 20.109,6.335 J2.B5@20.118,6.326 ; v1(20.128,25.39) 20.128,25.408 20.152,25.432 20.152,26.098 J3.B5@20.17,26.115 ; v1(22,9.5) TVS8.10@22,10.074 22,15.9 TVS9.10@22,20.723 TVS9.1@22,21.558 v1(22,22.2)
  Bottom Layer w0.335: v1(20.1,7) 20.112,7.012 20.168,7.012 20.691,7.536 20.691,8.012 22,9.321 v1(22,9.5) ; v1(20.128,25.39) 20.128,23.448 20.52,23.056 21.144,23.056 v1(22,22.2)
  other v1: 22.1,16.15
CS#: DISP1.24 U1.9 | length 6.7
  Top Layer w0.15: v1(5.3,22.7) 6.625,21.375 v1(6.625,17.9)
  Bottom Layer w0.15: v1(5.3,22.7) 5.3,22.754 5.398,22.852 5.398,23.267 DISP1.24@5.413,23.282 ; U1.9@6.625,17.174 v1(6.625,17.9)
D1_N: J2.A7 J3.A7 TVS6.1 TVS6.10 TVS7.1 TVS7.10 | length 17.9
  Top Layer w0.198: TVS7.1@18.801,21.559 18.801,21.741 18.7,21.842 18.7,21.857 18.7,22.54 19.333,23.173 19.333,24.198 19.369,24.235 19.369,24.564 J3.A7@19.42,24.615 ; TVS7.1@18.802,21.558 18.802,20.54 18.715,20.453 18.715,11.179 18.802,11.091 TVS6.10@18.802,10.074 18.802,9.891 18.713,9.802 18.713,9.359 18.713,9.199 19.521,8.392 19.521,8.102 19.646,7.977 19.817,7.977 19.868,7.926 J2.A7@19.868,7.726
D1_P: J2.A6 J3.A6 TVS6.2 TVS6.9 TVS7.2 TVS7.9 | length 17.9
  Top Layer w0.198: TVS6.2@18.302,10.909 TVS6.9@18.302,10.074 18.302,9.891 18.388,9.805 18.388,9.494 18.388,9.065 19.196,8.257 19.196,8.093 19.08,7.977 18.919,7.977 18.868,7.926 J2.A6@18.868,7.726 ; TVS6.2@18.302,10.909 18.303,11.092 18.39,11.179 18.39,20.453 18.302,20.54 TVS7.2@18.302,21.558 18.302,21.74 18.375,21.813 18.375,21.857 18.375,22.675 19.008,23.307 19.008,24.198 18.971,24.235 18.971,24.564 J3.A6@18.92,24.615
D2_N: J2.B7 J3.B7 TVS8.5 TVS8.6 TVS9.5 TVS9.6 | length 20.9
  Top Layer w0.198: v1(19.1,7) 19.118,6.982 J2.B7@19.118,6.326 ; v1(19.128,25.374) 19.149,25.395 19.149,26.094 J3.B7@19.17,26.115 ; v1(19.546,9.254) 19.585,9.292 19.752,9.292 20.071,9.611 20.071,9.821 20.001,9.89 TVS8.6@20,10.074 TVS8.6@20,10.074 20,11.091 20.088,11.179 20.088,20.453 20,20.54 TVS9.5@20,21.558 20,21.74 20.082,21.822 20.082,22.248 19.912,22.417 19.845,22.417 19.706,22.557 v1(19.651,22.557)
  Bottom Layer w0.198: v1(19.1,7) 19.139,7.039 19.139,7.242 19.187,7.29 19.187,7.943 19.187,8.782 19.449,9.044 19.449,9.102 19.546,9.199 v1(19.546,9.254) ; v1(19.128,25.374) 19.167,25.335 19.167,25.133 19.217,25.084 19.217,23.125 19.503,22.838 19.503,22.759 19.651,22.611 v1(19.651,22.557)
D2_P: J2.B6 J3.B6 TVS8.4 TVS8.7 TVS9.4 TVS9.7 | length 20.9
  Top Layer w0.198: v1@19.6,7 19.6,6.344 J2.B6@19.618,6.326 ; v1(19.628,25.375) 19.652,25.399 19.652,26.097 J3.B6@19.67,26.115 ; v1(19.9,8.855) 19.9,8.909 20.001,9.01 20.001,9.054 20.422,9.475 20.422,9.813 20.5,9.891 TVS8.7@20.5,10.074 20.5,11.091 20.413,11.179 20.413,20.453 20.5,20.54 TVS9.4@20.5,21.558 20.5,21.74 20.418,21.822 20.418,22.388 20.148,22.658 20.148,22.712 20,22.86 v1(20,22.914)
  Bottom Layer w0.198: v1(19.6,7) 19.561,7.039 19.561,7.242 19.512,7.29 19.512,8.077 19.512,8.647 19.681,8.816 19.861,8.816 v1(19.9,8.855) ; v1(19.628,25.375) 19.59,25.336 19.59,25.132 19.542,25.084 19.542,23.259 19.748,23.054 19.807,23.054 19.946,22.914 v1(20,22.914)
D/C#: DISP1.20 U1.11 | length 6.7
  Bottom Layer w0.15: DISP1.20@6.113,23.282 6.113,20.387 7.625,18.875 U1.11@7.625,17.174